# Altium PCB PCB1.PcbDoc (part 8 of 12)
Units mm, origin at the board's own origin, x right, y up, seen from the top; angles counter-clockwise.
Board outline 122.17 x 121.67 mm, 2 copper layers (Top Layer, Bottom Layer); 274 components, 225 nets, 941 pads, 421 vias.
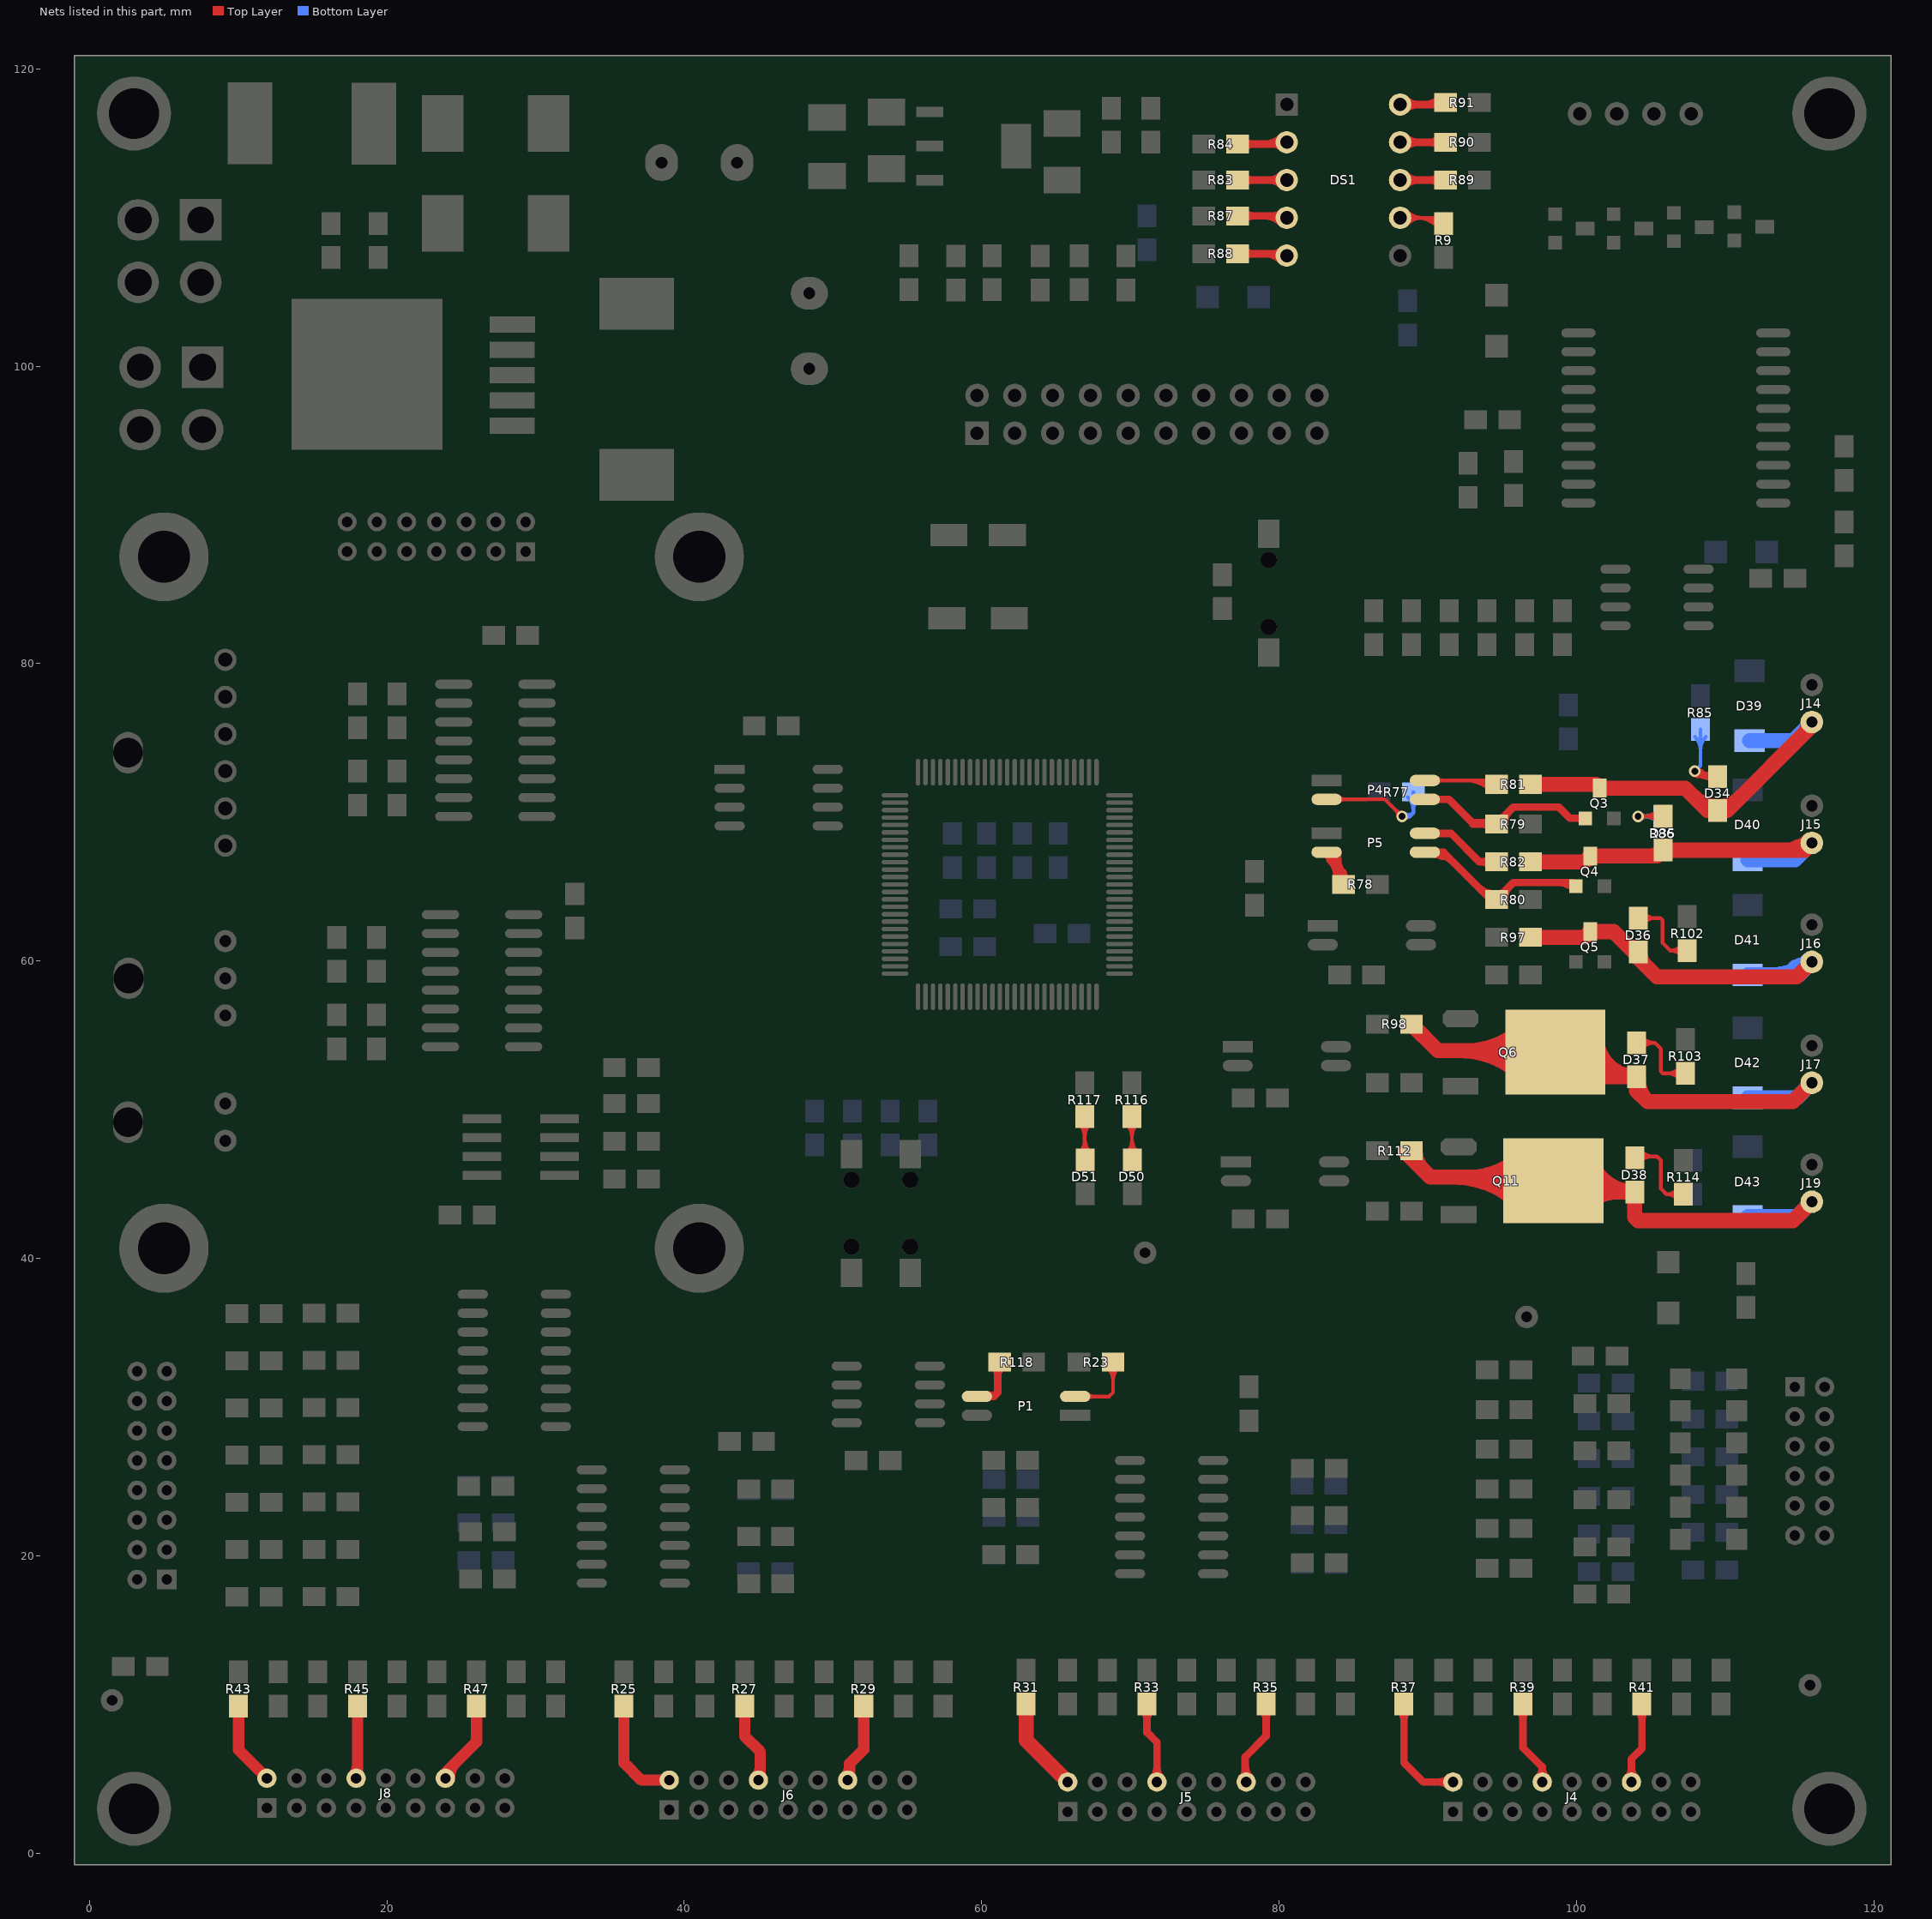
[diagram p8: the nets of this part, all layers, seen from the top]

## Via types
v1: diameter 0.762, hole 0.457, Top Layer to Bottom Layer, 339 vias
v2: diameter 1.27, hole 0.457, Top Layer to Bottom Layer, 39 vias
v3: diameter 0.889, hole 0.457, Top Layer to Bottom Layer, 21 vias
v4: diameter 1.27, hole 0.711, Top Layer to Bottom Layer, 12 vias
v5: diameter 1.524, hole 0.711, Top Layer to Bottom Layer, 5 vias
v6: diameter 1.016, hole 0.457, Top Layer to Bottom Layer, 3 vias
v7: diameter 0.711, hole 0.457, Top Layer to Bottom Layer, 1 vias
v8: diameter 1.524, hole 0.457, Top Layer to Bottom Layer, 1 vias

## Nets (pads, with @x,y where several pads share a name; then routed paths per layer and width w, separated by ;. In a path a pad name is that pad's centre, name@x,y a point inside that pad or via, vN(x,y) a via of type N, cw(c..) or ccw(c..) an arc to the next point about the centre after c; other vN are vias at no path point) (continued)
NetD34_1: D34.1 R85.2 | length 51.5
  Top Layer w0.254: D34.1@109.497,72.414 108.307,72.414 ; v1@107.77,72.591 ccw(c108.2,73.021) 108.2,72.414 ; v1@107.77,72.591 ccw(c108.2,73.021) 108.2,72.414 ; v1@107.77,72.591 ccw(c108.2,73.021) 108.2,72.414 ; v1(107.95,72.771) ccw(c108.697,73.202) 108.474,72.369 ; v1(107.95,72.771) ccw(c108.437,72.9) 108.306,72.414 ; v1(107.95,72.771) cw(c108.05,72.488) 108.31,72.638 ; v1(107.95,72.771) cw(c108.195,72.338) 108.444,72.769 ; v1(107.95,72.771) cw(c108.05,72.488) 108.31,72.638 ; v1(107.95,72.771) ccw(c108.697,73.202) 108.474,72.369 ; v1(107.95,72.771) ccw(c108.437,72.9) 108.306,72.414 ; v1(107.95,72.771) ccw(c108.813,73.634) 108.813,72.414 ; v1(107.95,72.771) cw(c108.05,72.488) 108.31,72.638 ; v1(107.95,72.771) cw(c108.195,72.338) 108.444,72.769 ; v1(107.95,72.771) ccw(c108.697,73.202) 108.474,72.369 ; v1(107.95,72.771) ccw(c108.437,72.9) 108.306,72.414 ; v1(107.95,72.771) ccw(c108.697,73.202) 108.474,72.369 ; v1(107.95,72.771) ccw(c108.437,72.9) 108.306,72.414 ; v1(107.95,72.771) ccw(c108.813,73.634) 108.813,72.414 ; v1(107.95,72.771) cw(c108.05,72.488) 108.31,72.638 ; v1(107.95,72.771) cw(c108.195,72.338) 108.444,72.769 ; v1(107.95,72.771) ccw(c108.697,73.202) 108.474,72.369 ; v1(107.95,72.771) ccw(c108.437,72.9) 108.306,72.414 ; v1(107.95,72.771) ccw(c108.697,73.202) 108.474,72.369 ; v1(107.95,72.771) ccw(c108.437,72.9) 108.306,72.414 ; v1(107.95,72.771) ccw(c108.813,73.634) 108.813,72.414 ; v1(107.95,72.771) 108.307,72.414 ; v1@107.987,72.52 cw(c108.042,72.148) 108.307,72.414 ; v1@107.987,72.52 cw(c108.042,72.148) 108.307,72.414 ; v1@107.987,72.52 cw(c108.042,72.148) 108.307,72.414 ; v1@108.013,72.525 cw(c108.078,72.267) 108.266,72.455 ; v1@108.013,72.525 cw(c108.078,72.267) 108.266,72.455 ; v1@108.013,72.525 cw(c108.078,72.267) 108.266,72.455 ; v1@108.013,72.525 cw(c108.078,72.267) 108.266,72.455 ; v1@108.016,72.526 cw(c108.174,71.933) 108.481,72.464 ; v1@108.016,72.526 cw(c108.174,71.933) 108.481,72.464 ; v1@108.016,72.526 cw(c108.174,71.933) 108.481,72.464 ; v1@108.075,72.55 cw(c108.449,71.89) 108.829,72.547 ; v1@108.075,72.55 cw(c108.449,71.89) 108.829,72.547 ; v1@108.075,72.55 cw(c108.449,71.89) 108.829,72.547 ; v1@108.13,72.951 ccw(c109.426,74.247) D34.1@109.426,72.414 ; v1@108.13,72.951 ccw(c109.426,74.247) D34.1@109.426,72.414 ; v1@108.13,72.951 ccw(c109.426,74.247) D34.1@109.426,72.414 ; v1@108.195,72.836 ccw(c108.926,73.03) 108.73,72.3 ; v1@108.195,72.836 ccw(c108.926,73.03) 108.73,72.3 ; v1@108.195,72.836 ccw(c108.926,73.03) 108.73,72.3 ; v1@108.195,72.836 ccw(c108.926,73.03) 108.73,72.3 ; v1@108.195,72.836 ccw(c108.926,73.03) 108.73,72.3 ; v1@108.195,72.836 ccw(c108.926,73.03) 108.73,72.3 ; v1@108.195,72.837 ccw(c108.788,72.995) 108.481,72.464 ; v1@108.195,72.837 ccw(c108.788,72.995) 108.481,72.464 ; v1@108.195,72.837 ccw(c108.788,72.995) 108.481,72.464 ; v1@108.196,72.708 ccw(c108.454,72.643) 108.266,72.455 ; v1@108.196,72.708 ccw(c108.454,72.643) 108.266,72.455 ; v1@108.196,72.708 ccw(c108.454,72.643) 108.266,72.455 ; v1@108.196,72.708 ccw(c108.454,72.643) 108.266,72.455 ; v1@108.201,72.734 ccw(c108.573,72.679) 108.307,72.414 ; v1@108.201,72.734 ccw(c108.573,72.679) 108.307,72.414 ; v1@108.201,72.734 ccw(c108.573,72.679) 108.307,72.414 ; 108.307,72.414 cw(c108.307,71.274) D34.1@109.13,72.062 ; 108.307,72.414 ccw(c108.307,73.553) D34.1@109.13,72.765 ; 108.307,72.414 cw(c108.307,71.274) D34.1@109.13,72.062 ; 108.307,72.414 ccw(c108.307,73.553) D34.1@109.13,72.765 ; 108.307,72.414 cw(c108.307,71.274) D34.1@109.13,72.062 ; 108.307,72.414 ccw(c108.307,73.553) D34.1@109.13,72.765 ; 108.745,72.596 cw(c108.636,72.188) D34.1@109.027,72.348 ; 108.745,72.596 ccw(c108.807,72.827) D34.1@109.028,72.735 ; 108.745,72.596 cw(c108.636,72.188) D34.1@109.027,72.348 ; 108.745,72.596 ccw(c108.807,72.827) D34.1@109.028,72.735 ; 108.745,72.596 cw(c108.636,72.188) D34.1@109.027,72.348 ; 108.745,72.596 ccw(c108.807,72.827) D34.1@109.028,72.735
  Bottom Layer w0.254: v1(107.95,72.771) 108.331,73.152 R85.2@108.331,75.565 ; R85.2@107.972,75.079 cw(c107.105,74.212) 108.331,74.212 ; R85.2@107.972,75.079 cw(c107.105,74.212) 108.331,74.212 ; R85.2@107.972,75.079 cw(c107.105,74.212) 108.331,74.212 ; 108.331,74.212 cw(c109.557,74.212) R85.2@108.69,75.079 ; 108.331,74.212 cw(c109.557,74.212) R85.2@108.69,75.079 ; 108.331,74.212 cw(c109.557,74.212) R85.2@108.69,75.079
NetD34_2: D34.2 D39.A J14.2 Q3.3 R81.2 | length 44.7
  Top Layer w1.016: R81.2@96.901,71.882 101.311,71.882 Q3.3@101.561,71.632 107.311,71.632 108.815,70.128 D34.2@109.497,70.128 110.133,70.128 115.824,75.819 J14.2@115.824,76.073 ; 107.9,71.043 ccw(c109.497,72.641) D34.2@109.497,70.382 ; 107.9,71.043 ccw(c109.497,72.641) D34.2@109.497,70.382 ; 107.9,71.043 ccw(c109.497,72.641) D34.2@109.497,70.382 ; 107.9,71.043 ccw(c109.497,72.641) D34.2@109.497,70.382 ; D34.2@109.497,70.382 ccw(c109.497,72.529) 111.015,71.01 ; D34.2@109.497,70.382 ccw(c109.497,72.529) 111.015,71.01 ; D34.2@109.497,70.382 ccw(c109.497,72.529) 111.015,71.01 ; D34.2@109.497,70.382 ccw(c109.497,72.529) 111.015,71.01 ; 115.211,75.206 ccw(c114.344,76.073) J14.2@115.57,76.073 ; 115.211,75.206 ccw(c114.344,76.073) J14.2@115.57,76.073 ; 115.211,75.206 ccw(c114.344,76.073) J14.2@115.57,76.073 ; 115.211,75.206 ccw(c114.344,76.073) J14.2@115.57,76.073
  Bottom Layer w1.016: D39.A@111.637,74.815 114.566,74.815 J14.2@115.824,76.073
NetD35_1: D35.1 R86.2 | length 26.5
  Top Layer w0.254: v1(104.14,69.723) 104.164,69.747 D35.1@105.814,69.747 ; v1@104.32,69.543 cw(c104.81,69.053) 104.81,69.747 ; v1@104.32,69.543 cw(c104.81,69.053) 104.81,69.747 ; v1@104.32,69.543 cw(c104.81,69.053) 104.81,69.747 ; v1@104.32,69.543 cw(c104.81,69.053) 104.81,69.747 ; v1@104.32,69.903 ccw(c104.696,70.279) 104.696,69.747 ; v1@104.32,69.903 ccw(c104.696,70.279) 104.696,69.747 ; v1@104.32,69.903 ccw(c104.696,70.279) 104.696,69.747 ; v1@104.32,69.903 ccw(c104.696,70.279) 104.696,69.747 ; 104.588,69.747 cw(c104.588,68.52) D35.1@105.455,69.387 ; 104.588,69.747 ccw(c104.588,70.973) D35.1@105.455,70.106 ; 104.588,69.747 cw(c104.588,68.52) D35.1@105.455,69.387 ; 104.588,69.747 ccw(c104.588,70.973) D35.1@105.455,70.106 ; 104.588,69.747 cw(c104.588,68.52) D35.1@105.455,69.387 ; 104.588,69.747 ccw(c104.588,70.973) D35.1@105.455,70.106 ; 104.588,69.747 cw(c104.588,68.52) D35.1@105.455,69.387 ; 104.588,69.747 ccw(c104.588,70.973) D35.1@105.455,70.106
  Bottom Layer w0.254: v1(104.14,69.723) R86.2@105.791,69.723 ; v1@104.32,69.543 cw(c104.753,69.11) 104.753,69.723 ; v1@104.32,69.543 cw(c104.753,69.11) 104.753,69.723 ; v1@104.32,69.543 cw(c104.753,69.11) 104.753,69.723 ; v1@104.32,69.543 cw(c104.753,69.11) 104.753,69.723 ; v1@104.32,69.903 ccw(c104.753,70.336) 104.753,69.723 ; v1@104.32,69.903 ccw(c104.753,70.336) 104.753,69.723 ; v1@104.32,69.903 ccw(c104.753,70.336) 104.753,69.723 ; v1@104.32,69.903 ccw(c104.753,70.336) 104.753,69.723 ; 104.565,69.723 cw(c104.565,68.497) R86.2@105.432,69.364 ; 104.565,69.723 ccw(c104.565,70.949) R86.2@105.432,70.082 ; 104.565,69.723 cw(c104.565,68.497) R86.2@105.432,69.364 ; 104.565,69.723 ccw(c104.565,70.949) R86.2@105.432,70.082 ; 104.565,69.723 cw(c104.565,68.497) R86.2@105.432,69.364 ; 104.565,69.723 ccw(c104.565,70.949) R86.2@105.432,70.082 ; 104.565,69.723 cw(c104.565,68.497) R86.2@105.432,69.364 ; 104.565,69.723 ccw(c104.565,70.949) R86.2@105.432,70.082
NetD35_2: D35.2 D40.A J15.2 Q4.3 R82.2 | length 41.4
  Top Layer w1.016: R82.2@96.901,66.675 100.542,66.675 Q4.3@100.926,67.06 105.413,67.06 D35.2@105.814,67.461 115.34,67.461 J15.2@115.824,67.945 ; 104.846,67.06 ccw(c104.846,68.302) D35.2@105.724,67.423 ; 104.846,67.06 ccw(c104.846,68.302) D35.2@105.724,67.423 ; 104.846,67.06 ccw(c104.846,68.302) D35.2@105.724,67.423 ; 104.846,67.06 ccw(c104.846,68.302) D35.2@105.724,67.423 ; 114.041,67.461 ccw(c114.041,69.728) J15.2@115.644,68.125 ; 114.041,67.461 ccw(c114.041,69.728) J15.2@115.644,68.125 ; 114.041,67.461 ccw(c114.041,69.728) J15.2@115.644,68.125 ; 114.041,67.461 ccw(c114.041,69.728) J15.2@115.644,68.125 ; 114.751,67.609 cw(c115.352,66.568) J15.2@115.742,67.705 ; 114.751,67.609 cw(c115.352,66.568) J15.2@115.742,67.705 ; 114.751,67.609 cw(c115.352,66.568) J15.2@115.742,67.705 ; 114.751,67.609 cw(c115.352,66.568) J15.2@115.742,67.705 ; 114.751,67.609 cw(c115.352,66.568) J15.2@115.742,67.705 ; 114.751,67.609 cw(c115.352,66.568) J15.2@115.742,67.705
  Bottom Layer w1.016: D40.A@111.51,66.814 114.693,66.814 J15.2@115.824,67.945
NetD36_1: D36.1 R102.2 | length 18.4
  Top Layer w0.254: D36.1@104.163,62.889 105.259,62.889 ; R102.2@107.442,60.706 106.299,60.706 ; D36.1@104.551,62.56 cw(c105.259,61.96) 105.259,62.889 ; D36.1@104.551,62.56 cw(c105.259,61.96) 105.259,62.889 ; D36.1@104.551,62.56 cw(c105.259,61.96) 105.259,62.889 ; D36.1@104.551,62.56 cw(c105.259,61.96) 105.259,62.889 ; D36.1@104.551,63.217 ccw(c105.259,63.817) 105.259,62.889 ; D36.1@104.551,63.217 ccw(c105.259,63.817) 105.259,62.889 ; D36.1@104.551,63.217 ccw(c105.259,63.817) 105.259,62.889 ; D36.1@104.551,63.217 ccw(c105.259,63.817) 105.259,62.889 ; 105.259,62.889 105.64,62.889 105.791,62.738 105.791,62.357 105.791,61.214 106.299,60.706 ; 106.299,60.706 cw(c106.299,59.674) R102.2@107.065,60.366 ; 106.299,60.706 ccw(c106.299,61.738) R102.2@107.065,61.046 ; 106.299,60.706 cw(c106.299,59.674) R102.2@107.065,60.366 ; 106.299,60.706 ccw(c106.299,61.738) R102.2@107.065,61.046 ; 106.299,60.706 cw(c106.299,59.674) R102.2@107.065,60.366 ; 106.299,60.706 ccw(c106.299,61.738) R102.2@107.065,61.046 ; 106.299,60.706 cw(c106.299,59.674) R102.2@107.065,60.366 ; 106.299,60.706 ccw(c106.299,61.738) R102.2@107.065,61.046
NetD36_2: D36.2 D41.A J16.2 Q5.3 R97.2 | length 54.2
  Top Layer w1.016: R97.2@96.901,61.595 100.542,61.595 Q5.3@100.926,61.98 102.485,61.98 103.862,60.603 D36.2@104.163,60.603 104.163,60.175 105.41,58.928 114.808,58.928 J16.2@115.824,59.944 ; 103.216,61.249 ccw(c104.163,62.196) D36.2@104.163,60.857 ; 103.216,61.249 ccw(c104.163,62.196) D36.2@104.163,60.857 ; 103.216,61.249 ccw(c104.163,62.196) D36.2@104.163,60.857 ; 103.216,61.249 ccw(c104.163,62.196) D36.2@104.163,60.857 ; D36.2@104.29,60.476 ccw(c105.323,60.476) 104.593,59.745 ; D36.2@104.29,60.476 ccw(c105.323,60.476) 104.593,59.745 ; D36.2@104.29,60.476 ccw(c105.323,60.476) 104.593,59.745 ; D36.2@104.29,60.476 ccw(c105.323,60.476) 104.593,59.745
  Bottom Layer w1.016: D41.A@111.51,59.067 114.947,59.067 J16.2@115.824,59.944 ; 113.094,59.067 ccw(c113.094,62.674) J16.2@115.644,60.124 ; 113.094,59.067 ccw(c113.094,62.674) J16.2@115.644,60.124 ; 113.094,59.067 ccw(c113.094,62.674) J16.2@115.644,60.124 ; 113.094,59.067 ccw(c113.094,62.674) J16.2@115.644,60.124 ; 114.657,59.554 cw(c115.383,58.297) J16.2@115.758,59.699 ; 114.657,59.554 cw(c115.383,58.297) J16.2@115.758,59.699 ; 114.657,59.554 cw(c115.383,58.297) J16.2@115.758,59.699 ; 114.657,59.554 cw(c115.383,58.297) J16.2@115.758,59.699 ; 114.657,59.554 cw(c115.383,58.297) J16.2@115.758,59.699 ; 114.657,59.554 cw(c115.383,58.297) J16.2@115.758,59.699 ; 115.007,59.699 ccw(c115.007,60.362) J16.2@115.598,60.06 ; 115.007,59.699 ccw(c115.007,60.362) J16.2@115.598,60.06 ; 115.007,59.699 ccw(c115.007,60.362) J16.2@115.598,60.06 ; 115.007,59.699 ccw(c115.007,60.362) J16.2@115.598,60.06
NetD37_1: D37.1 R103.2 | length 20.4
  Top Layer w0.254: D37.1@104.036,54.507 105.259,54.507 ; R103.2@107.315,52.451 105.791,52.451 105.664,52.578 105.664,54.102 105.259,54.507 ; D37.1@104.396,54.148 cw(c105.259,53.288) 105.259,54.507 ; D37.1@104.396,54.148 cw(c105.259,53.288) 105.259,54.507 ; D37.1@104.396,54.148 cw(c105.259,53.288) 105.259,54.507 ; D37.1@104.396,54.148 cw(c105.259,53.288) 105.259,54.507 ; D37.1@104.396,54.865 ccw(c105.259,55.725) 105.259,54.507 ; D37.1@104.396,54.865 ccw(c105.259,55.725) 105.259,54.507 ; D37.1@104.396,54.865 ccw(c105.259,55.725) 105.259,54.507 ; D37.1@104.396,54.865 ccw(c105.259,55.725) 105.259,54.507 ; 106.089,52.451 cw(c106.089,51.225) R103.2@106.956,52.092 ; 106.089,52.451 ccw(c106.089,53.677) R103.2@106.956,52.81 ; 106.089,52.451 cw(c106.089,51.225) R103.2@106.956,52.092 ; 106.089,52.451 ccw(c106.089,53.677) R103.2@106.956,52.81 ; 106.089,52.451 cw(c106.089,51.225) R103.2@106.956,52.092 ; 106.089,52.451 ccw(c106.089,53.677) R103.2@106.956,52.81 ; 106.089,52.451 cw(c106.089,51.225) R103.2@106.956,52.092 ; 106.089,52.451 ccw(c106.089,53.677) R103.2@106.956,52.81
NetD37_2: D37.2 D42.A J17.2 Q6.2 R98.2 | length 137.4
  Top Layer w1.016: R98.2@88.9,55.753 90.678,53.975 98.806,53.975 98.933,53.848 100.56,52.221 D37.2@104.036,52.221 ; 92.162,53.975 cw(c92.162,47.956) Q6.2@96.418,52.212 ; 92.652,53.975 ccw(c92.652,59.3) Q6.2@96.418,55.535 ; 94.614,53.975 cw(c94.614,50.409) Q6.2@97.136,52.93 ; 95.105,53.975 ccw(c95.105,56.847) Q6.2@97.136,54.816 ; Q6.2@99.406,53.939 ccw(c101.527,54.39) Q6.2@101.527,52.221 ; Q6.2@100.399,54.15 ccw(c102.782,54.656) 102.782,52.221 ; Q6.2@101.393,54.361 ccw(c104.036,54.922) D37.2@104.036,52.221 ; J17.2@115.824,51.816 114.554,50.546 104.775,50.546 ; 92.152,53.975 cw(c92.152,47.956) Q6.2@96.408,52.212 ; 92.152,53.975 cw(c92.152,47.956) Q6.2@96.408,52.212 ; 92.152,53.975 cw(c92.152,47.956) Q6.2@96.408,52.212 ; 92.642,53.975 ccw(c92.642,59.3) Q6.2@96.408,55.535 ; 92.642,53.975 ccw(c92.642,59.3) Q6.2@96.408,55.535 ; 92.642,53.975 ccw(c92.642,59.3) Q6.2@96.408,55.535 ; 94.605,53.975 cw(c94.605,50.409) Q6.2@97.126,52.93 ; 94.605,53.975 cw(c94.605,50.409) Q6.2@97.126,52.93 ; 94.605,53.975 cw(c94.605,50.409) Q6.2@97.126,52.93 ; 95.095,53.975 ccw(c95.095,56.847) Q6.2@97.126,54.816 ; 95.095,53.975 ccw(c95.095,56.847) Q6.2@97.126,54.816 ; 95.095,53.975 ccw(c95.095,56.847) Q6.2@97.126,54.816 ; Q6.2@99.396,53.94 ccw(c101.523,54.396) Q6.2@101.523,52.221 ; Q6.2@99.396,53.94 ccw(c101.523,54.396) Q6.2@101.523,52.221 ; Q6.2@99.396,53.94 ccw(c101.523,54.396) Q6.2@101.523,52.221 ; Q6.2@100.389,54.153 ccw(c102.779,54.665) 102.779,52.221 ; Q6.2@100.389,54.153 ccw(c102.779,54.665) 102.779,52.221 ; Q6.2@100.389,54.153 ccw(c102.779,54.665) 102.779,52.221 ; Q6.2@101.383,54.366 ccw(c104.036,54.934) D37.2@104.036,52.221 ; Q6.2@101.383,54.366 ccw(c104.036,54.934) D37.2@104.036,52.221 ; Q6.2@101.383,54.366 ccw(c104.036,54.934) D37.2@104.036,52.221 ; D37.2@104.036,52.221 104.036,51.285 104.775,50.546 ; D37.2@104.163,52.09 ccw(c106.254,52.025) 104.775,50.546 ; D37.2@104.163,52.09 ccw(c106.254,52.025) 104.775,50.546 ; D37.2@104.163,52.09 ccw(c106.254,52.025) 104.775,50.546 ; D37.2@104.163,52.09 ccw(c106.254,52.025) 104.775,50.546
  Bottom Layer w1.016: D42.A@111.51,50.812 114.82,50.812 J17.2@115.824,51.816
NetD38_1: D38.1 R114.2 | length 22.3
  Top Layer w0.254: D38.1@103.909,46.76 104.013,46.863 105.41,46.863 105.664,46.609 105.664,44.704 106.045,44.323 ; R114.2@107.188,44.323 106.045,44.323 ; D38.1@104.089,47.066 ccw(c104.579,47.557) 104.579,46.863 ; D38.1@104.089,47.066 ccw(c104.579,47.557) 104.579,46.863 ; D38.1@104.089,47.066 ccw(c104.579,47.557) 104.579,46.863 ; D38.1@104.089,47.066 ccw(c104.579,47.557) 104.579,46.863 ; D38.1@104.268,46.527 cw(c105.079,45.717) 105.079,46.863 ; D38.1@104.268,46.527 cw(c105.079,45.717) 105.079,46.863 ; D38.1@104.268,46.527 cw(c105.079,45.717) 105.079,46.863 ; D38.1@104.268,46.527 cw(c105.079,45.717) 105.079,46.863 ; D38.1@104.268,47.246 ccw(c105.193,48.17) 105.193,46.863 ; D38.1@104.268,47.246 ccw(c105.193,48.17) 105.193,46.863 ; D38.1@104.268,47.246 ccw(c105.193,48.17) 105.193,46.863 ; D38.1@104.268,47.246 ccw(c105.193,48.17) 105.193,46.863 ; 106.045,44.323 cw(c106.045,43.291) R114.2@106.811,43.983 ; 106.045,44.323 ccw(c106.045,45.355) R114.2@106.811,44.663 ; 106.045,44.323 cw(c106.045,43.291) R114.2@106.811,43.983 ; 106.045,44.323 ccw(c106.045,45.355) R114.2@106.811,44.663 ; 106.045,44.323 cw(c106.045,43.291) R114.2@106.811,43.983 ; 106.045,44.323 ccw(c106.045,45.355) R114.2@106.811,44.663 ; 106.045,44.323 cw(c106.045,43.291) R114.2@106.811,43.983 ; 106.045,44.323 ccw(c106.045,45.355) R114.2@106.811,44.663
NetD38_2: D38.2 D43.A J19.2 Q11.2 R112.2 | length 123.8
  Top Layer w1.016: R112.2@88.519,47.117 90.17,45.466 98.679,45.466 98.933,45.212 99.671,44.474 D38.2@103.909,44.474 ; 91.728,45.466 cw(c91.728,39.013) Q11.2@96.291,43.576 ; 92.832,45.466 ccw(c92.832,50.358) Q11.2@96.291,46.899 ; 94.181,45.466 cw(c94.181,41.466) Q11.2@97.009,44.294 ; Q11.2@100.171,45.813 ccw(c102.297,46.83) 102.297,44.474 ; Q11.2@100.629,43.576 cw(c102.796,41.409) 102.796,44.474 ; Q11.2@101.087,46.252 ccw(c103.909,47.602) D38.2@103.909,44.474 ; J19.2@115.824,43.815 114.554,42.545 104.14,42.545 103.909,42.776 D38.2@103.909,44.474 ; R112.2@89.154,47.244 ccw(c90.994,47.244) 89.693,45.943 ; R112.2@89.154,47.244 ccw(c90.994,47.244) 89.693,45.943 ; R112.2@89.154,47.244 ccw(c90.994,47.244) 89.693,45.943 ; R112.2@89.154,47.244 ccw(c90.994,47.244) 89.693,45.943 ; 91.718,45.466 cw(c91.718,39.013) Q11.2@96.281,43.576 ; 91.718,45.466 cw(c91.718,39.013) Q11.2@96.281,43.576 ; 91.718,45.466 cw(c91.718,39.013) Q11.2@96.281,43.576 ; 92.822,45.466 ccw(c92.822,50.358) Q11.2@96.281,46.899 ; 92.822,45.466 ccw(c92.822,50.358) Q11.2@96.281,46.899 ; 92.822,45.466 ccw(c92.822,50.358) Q11.2@96.281,46.899 ; 94.171,45.466 cw(c94.171,41.466) Q11.2@96.999,44.294 ; 94.171,45.466 cw(c94.171,41.466) Q11.2@96.999,44.294 ; 94.171,45.466 cw(c94.171,41.466) Q11.2@96.999,44.294 ; Q11.2@100.16,45.815 ccw(c102.293,46.84) 102.293,44.474 ; Q11.2@100.16,45.815 ccw(c102.293,46.84) 102.293,44.474 ; Q11.2@100.16,45.815 ccw(c102.293,46.84) 102.293,44.474 ; Q11.2@100.62,43.576 cw(c102.787,41.409) 102.787,44.474 ; Q11.2@100.62,43.576 cw(c102.787,41.409) 102.787,44.474 ; Q11.2@100.62,43.576 cw(c102.787,41.409) 102.787,44.474 ; Q11.2@101.076,46.255 ccw(c103.909,47.617) D38.2@103.909,44.474 ; Q11.2@101.076,46.255 ccw(c103.909,47.617) D38.2@103.909,44.474 ; Q11.2@101.076,46.255 ccw(c103.909,47.617) D38.2@103.909,44.474
  Bottom Layer w1.016: D43.A@111.51,42.811 114.82,42.811 J19.2@115.824,43.815
NetD50_1: D50.1 R116.2 | length 16.1
  Top Layer w0.254: R116.2@70.104,49.53 70.104,46.656 D50.1@70.127,46.633 ; R116.2@69.745,49.044 cw(c68.878,48.177) 70.104,48.177 ; R116.2@69.745,49.044 cw(c68.878,48.177) 70.104,48.177 ; R116.2@69.745,49.044 cw(c68.878,48.177) 70.104,48.177 ; D50.1@69.768,47.119 ccw(c68.957,47.93) 70.104,47.93 ; D50.1@69.768,47.119 ccw(c68.957,47.93) 70.104,47.93 ; D50.1@69.768,47.119 ccw(c68.957,47.93) 70.104,47.93 ; 70.104,47.429 ccw(c70.796,47.429) D50.1@70.307,46.939 ; 70.104,47.429 ccw(c70.796,47.429) D50.1@70.307,46.939 ; 70.104,47.429 ccw(c70.796,47.429) D50.1@70.307,46.939 ; 70.104,48.042 ccw(c71.41,48.042) D50.1@70.486,47.119 ; 70.104,48.042 ccw(c71.41,48.042) D50.1@70.486,47.119 ; 70.104,48.042 ccw(c71.41,48.042) D50.1@70.486,47.119 ; 70.104,48.177 cw(c71.33,48.177) R116.2@70.463,49.044 ; 70.104,48.177 cw(c71.33,48.177) R116.2@70.463,49.044 ; 70.104,48.177 cw(c71.33,48.177) R116.2@70.463,49.044
NetD51_1: D51.1 R117.2 | length 16.1
  Top Layer w0.254: R117.2@66.929,49.53 66.929,46.656 D51.1@66.952,46.633 ; R117.2@66.57,49.044 cw(c65.703,48.177) 66.929,48.177 ; R117.2@66.57,49.044 cw(c65.703,48.177) 66.929,48.177 ; R117.2@66.57,49.044 cw(c65.703,48.177) 66.929,48.177 ; D51.1@66.593,47.119 ccw(c65.782,47.93) 66.929,47.93 ; D51.1@66.593,47.119 ccw(c65.782,47.93) 66.929,47.93 ; D51.1@66.593,47.119 ccw(c65.782,47.93) 66.929,47.93 ; 66.929,47.429 ccw(c67.621,47.429) D51.1@67.132,46.939 ; 66.929,47.429 ccw(c67.621,47.429) D51.1@67.132,46.939 ; 66.929,47.429 ccw(c67.621,47.429) D51.1@67.132,46.939 ; 66.929,48.042 ccw(c68.235,48.042) D51.1@67.311,47.119 ; 66.929,48.042 ccw(c68.235,48.042) D51.1@67.311,47.119 ; 66.929,48.042 ccw(c68.235,48.042) D51.1@67.311,47.119 ; 66.929,48.177 cw(c68.155,48.177) R117.2@67.288,49.044 ; 66.929,48.177 cw(c68.155,48.177) R117.2@67.288,49.044 ; 66.929,48.177 cw(c68.155,48.177) R117.2@67.288,49.044
NetDS1_2: DS1.2 R84.2 | length 16.7
  Top Layer w0.508: R84.2@77.216,114.935 80.391,114.935 DS1.2@80.518,115.062 ; R84.2@77.612,114.666 cw(c78.263,114.015) 78.263,114.935 ; R84.2@77.612,114.666 cw(c78.263,114.015) 78.263,114.935 ; R84.2@77.612,114.666 cw(c78.263,114.015) 78.263,114.935 ; R84.2@77.612,114.666 cw(c78.263,114.015) 78.263,114.935 ; R84.2@77.612,115.204 ccw(c78.263,115.855) 78.263,114.935 ; R84.2@77.612,115.204 ccw(c78.263,115.855) 78.263,114.935 ; R84.2@77.612,115.204 ccw(c78.263,115.855) 78.263,114.935 ; R84.2@77.612,115.204 ccw(c78.263,115.855) 78.263,114.935 ; 79.014,114.935 ccw(c79.014,116.566) DS1.2@80.167,115.413 ; 79.014,114.935 ccw(c79.014,116.566) DS1.2@80.167,115.413 ; 79.014,114.935 ccw(c79.014,116.566) DS1.2@80.167,115.413 ; 79.014,114.935 ccw(c79.014,116.566) DS1.2@80.167,115.413 ; 79.627,114.935 cw(c79.627,114.171) DS1.2@80.167,114.711 ; 79.627,114.935 cw(c79.627,114.171) DS1.2@80.167,114.711 ; 79.627,114.935 cw(c79.627,114.171) DS1.2@80.167,114.711 ; 79.627,114.935 cw(c79.627,114.171) DS1.2@80.167,114.711
NetDS1_3: DS1.3 R83.2 | length 16.6
  Top Layer w0.508: R83.2@77.216,112.522 DS1.3@80.518,112.522 ; R83.2@77.612,112.253 cw(c78.263,111.602) 78.263,112.522 ; R83.2@77.612,112.253 cw(c78.263,111.602) 78.263,112.522 ; R83.2@77.612,112.253 cw(c78.263,111.602) 78.263,112.522 ; R83.2@77.612,112.253 cw(c78.263,111.602) 78.263,112.522 ; R83.2@77.612,112.791 ccw(c78.263,113.442) 78.263,112.522 ; R83.2@77.612,112.791 ccw(c78.263,113.442) 78.263,112.522 ; R83.2@77.612,112.791 ccw(c78.263,113.442) 78.263,112.522 ; R83.2@77.612,112.791 ccw(c78.263,113.442) 78.263,112.522 ; 79.321,112.522 cw(c79.321,111.325) DS1.3@80.167,112.171 ; 79.321,112.522 ccw(c79.321,113.719) DS1.3@80.167,112.873 ; 79.321,112.522 cw(c79.321,111.325) DS1.3@80.167,112.171 ; 79.321,112.522 ccw(c79.321,113.719) DS1.3@80.167,112.873 ; 79.321,112.522 cw(c79.321,111.325) DS1.3@80.167,112.171 ; 79.321,112.522 ccw(c79.321,113.719) DS1.3@80.167,112.873 ; 79.321,112.522 cw(c79.321,111.325) DS1.3@80.167,112.171 ; 79.321,112.522 ccw(c79.321,113.719) DS1.3@80.167,112.873
NetDS1_4: DS1.4 R87.2 | length 16.7
  Top Layer w0.508: R87.2@77.216,110.109 80.391,110.109 DS1.4@80.518,109.982 ; R87.2@77.612,109.84 cw(c78.263,109.189) 78.263,110.109 ; R87.2@77.612,109.84 cw(c78.263,109.189) 78.263,110.109 ; R87.2@77.612,109.84 cw(c78.263,109.189) 78.263,110.109 ; R87.2@77.612,109.84 cw(c78.263,109.189) 78.263,110.109 ; R87.2@77.612,110.378 ccw(c78.263,111.029) 78.263,110.109 ; R87.2@77.612,110.378 ccw(c78.263,111.029) 78.263,110.109 ; R87.2@77.612,110.378 ccw(c78.263,111.029) 78.263,110.109 ; R87.2@77.612,110.378 ccw(c78.263,111.029) 78.263,110.109 ; 79.014,110.109 cw(c79.014,108.478) DS1.4@80.167,109.631 ; 79.014,110.109 cw(c79.014,108.478) DS1.4@80.167,109.631 ; 79.014,110.109 cw(c79.014,108.478) DS1.4@80.167,109.631 ; 79.014,110.109 cw(c79.014,108.478) DS1.4@80.167,109.631 ; 79.627,110.109 ccw(c79.627,110.873) DS1.4@80.167,110.333 ; 79.627,110.109 ccw(c79.627,110.873) DS1.4@80.167,110.333 ; 79.627,110.109 ccw(c79.627,110.873) DS1.4@80.167,110.333 ; 79.627,110.109 ccw(c79.627,110.873) DS1.4@80.167,110.333
NetDS1_5: DS1.5 R88.2 | length 16.7
  Top Layer w0.508: R88.2@77.216,107.569 80.391,107.569 DS1.5@80.518,107.442 ; R88.2@77.612,107.3 cw(c78.263,106.649) 78.263,107.569 ; R88.2@77.612,107.3 cw(c78.263,106.649) 78.263,107.569 ; R88.2@77.612,107.3 cw(c78.263,106.649) 78.263,107.569 ; R88.2@77.612,107.3 cw(c78.263,106.649) 78.263,107.569 ; R88.2@77.612,107.838 ccw(c78.263,108.489) 78.263,107.569 ; R88.2@77.612,107.838 ccw(c78.263,108.489) 78.263,107.569 ; R88.2@77.612,107.838 ccw(c78.263,108.489) 78.263,107.569 ; R88.2@77.612,107.838 ccw(c78.263,108.489) 78.263,107.569 ; 79.014,107.569 cw(c79.014,105.938) DS1.5@80.167,107.091 ; 79.014,107.569 cw(c79.014,105.938) DS1.5@80.167,107.091 ; 79.014,107.569 cw(c79.014,105.938) DS1.5@80.167,107.091 ; 79.014,107.569 cw(c79.014,105.938) DS1.5@80.167,107.091 ; 79.627,107.569 ccw(c79.627,108.333) DS1.5@80.167,107.793 ; 79.627,107.569 ccw(c79.627,108.333) DS1.5@80.167,107.793 ; 79.627,107.569 ccw(c79.627,108.333) DS1.5@80.167,107.793 ; 79.627,107.569 ccw(c79.627,108.333) DS1.5@80.167,107.793
NetDS1_7: DS1.7 R9.2 | length 35
  Top Layer w0.254: DS1.7@88.138,109.982 90.678,109.982 R9.2@91.059,109.601 ; DS1.7@88.399,109.721 cw(c89.029,109.091) 89.029,109.982 ; DS1.7@88.399,109.721 cw(c89.029,109.091) 89.029,109.982 ; DS1.7@88.399,109.721 cw(c89.029,109.091) 89.029,109.982 ; DS1.7@88.399,109.721 cw(c89.029,109.091) 89.029,109.982 ; DS1.7@88.399,110.243 ccw(c89.029,110.873) 89.029,109.982 ; DS1.7@88.399,110.243 ccw(c89.029,110.873) 89.029,109.982 ; DS1.7@88.399,110.243 ccw(c89.029,110.873) 89.029,109.982 ; DS1.7@88.399,110.243 ccw(c89.029,110.873) 89.029,109.982 ; DS1.7@88.579,109.541 cw(c89.642,108.478) 89.642,109.982 ; DS1.7@88.579,109.541 cw(c89.642,108.478) 89.642,109.982 ; DS1.7@88.579,109.541 cw(c89.642,108.478) 89.642,109.982 ; DS1.7@88.579,109.541 cw(c89.642,108.478) 89.642,109.982 ; DS1.7@88.579,110.423 ccw(c89.642,111.486) 89.642,109.982 ; DS1.7@88.579,110.423 ccw(c89.642,111.486) 89.642,109.982 ; DS1.7@88.579,110.423 ccw(c89.642,111.486) 89.642,109.982 ; DS1.7@88.579,110.423 ccw(c89.642,111.486) 89.642,109.982 ; 89.219,109.982 cw(c89.219,107.888) R9.2@90.7,109.369 ; 89.219,109.982 cw(c89.219,107.888) R9.2@90.7,109.369 ; 89.219,109.982 cw(c89.219,107.888) R9.2@90.7,109.369 ; 89.219,109.982 cw(c89.219,107.888) R9.2@90.7,109.369 ; 89.833,109.982 cw(c89.833,108.502) R9.2@90.879,109.548 ; 89.833,109.982 cw(c89.833,108.502) R9.2@90.879,109.548 ; 89.833,109.982 cw(c89.833,108.502) R9.2@90.879,109.548 ; 89.833,109.982 cw(c89.833,108.502) R9.2@90.879,109.548 ; 90.387,109.833 cw(c90.193,109.496) R9.2@90.568,109.597 ; 90.387,109.833 cw(c90.193,109.496) R9.2@90.568,109.597 ; 90.387,109.833 cw(c90.193,109.496) R9.2@90.568,109.597 ; 90.387,109.833 cw(c90.193,109.496) R9.2@90.568,109.597 ; 90.387,109.833 cw(c90.193,109.496) R9.2@90.568,109.597 ; 90.387,109.833 cw(c90.193,109.496) R9.2@90.568,109.597 ; R9.2@90.446,109.982 cw(c90.446,109.115) R9.2@91.059,109.728 ; R9.2@90.446,109.982 ccw(c90.446,110.341) R9.2@90.7,110.087 ; R9.2@90.446,109.982 cw(c90.446,109.115) R9.2@91.059,109.728 ; R9.2@90.446,109.982 ccw(c90.446,110.341) R9.2@90.7,110.087 ; R9.2@90.446,109.982 cw(c90.446,109.115) R9.2@91.059,109.728 ; R9.2@90.446,109.982 ccw(c90.446,110.341) R9.2@90.7,110.087 ; R9.2@90.446,109.982 cw(c90.446,109.115) R9.2@91.059,109.728 ; R9.2@90.446,109.982 ccw(c90.446,110.341) R9.2@90.7,110.087
NetDS1_8: DS1.8 R89.2 | length 16.4
  Top Layer w0.508: DS1.8@88.138,112.522 R89.2@91.186,112.522 ; DS1.8@88.489,112.171 cw(c89.335,111.325) 89.335,112.522 ; DS1.8@88.489,112.171 cw(c89.335,111.325) 89.335,112.522 ; DS1.8@88.489,112.171 cw(c89.335,111.325) 89.335,112.522 ; DS1.8@88.489,112.171 cw(c89.335,111.325) 89.335,112.522 ; DS1.8@88.489,112.873 ccw(c89.335,113.719) 89.335,112.522 ; DS1.8@88.489,112.873 ccw(c89.335,113.719) 89.335,112.522 ; DS1.8@88.489,112.873 ccw(c89.335,113.719) 89.335,112.522 ; DS1.8@88.489,112.873 ccw(c89.335,113.719) 89.335,112.522 ; 90.139,112.522 cw(c90.139,111.602) R89.2@90.79,112.253 ; 90.139,112.522 ccw(c90.139,113.442) R89.2@90.79,112.791 ; 90.139,112.522 cw(c90.139,111.602) R89.2@90.79,112.253 ; 90.139,112.522 ccw(c90.139,113.442) R89.2@90.79,112.791 ; 90.139,112.522 cw(c90.139,111.602) R89.2@90.79,112.253 ; 90.139,112.522 ccw(c90.139,113.442) R89.2@90.79,112.791 ; 90.139,112.522 cw(c90.139,111.602) R89.2@90.79,112.253 ; 90.139,112.522 ccw(c90.139,113.442) R89.2@90.79,112.791
NetDS1_9: DS1.9 R90.2 | length 16.4
  Top Layer w0.508: DS1.9@88.138,115.062 R90.2@91.186,115.062 ; DS1.9@88.489,114.711 cw(c89.335,113.865) 89.335,115.062 ; DS1.9@88.489,114.711 cw(c89.335,113.865) 89.335,115.062 ; DS1.9@88.489,114.711 cw(c89.335,113.865) 89.335,115.062 ; DS1.9@88.489,114.711 cw(c89.335,113.865) 89.335,115.062 ; DS1.9@88.489,115.413 ccw(c89.335,116.259) 89.335,115.062 ; DS1.9@88.489,115.413 ccw(c89.335,116.259) 89.335,115.062 ; DS1.9@88.489,115.413 ccw(c89.335,116.259) 89.335,115.062 ; DS1.9@88.489,115.413 ccw(c89.335,116.259) 89.335,115.062 ; 90.139,115.062 cw(c90.139,114.142) R90.2@90.79,114.793 ; 90.139,115.062 ccw(c90.139,115.982) R90.2@90.79,115.331 ; 90.139,115.062 cw(c90.139,114.142) R90.2@90.79,114.793 ; 90.139,115.062 ccw(c90.139,115.982) R90.2@90.79,115.331 ; 90.139,115.062 cw(c90.139,114.142) R90.2@90.79,114.793 ; 90.139,115.062 ccw(c90.139,115.982) R90.2@90.79,115.331 ; 90.139,115.062 cw(c90.139,114.142) R90.2@90.79,114.793 ; 90.139,115.062 ccw(c90.139,115.982) R90.2@90.79,115.331
NetDS1_10: DS1.10 R91.2 | length 14.9
  Top Layer w0.508: DS1.10@88.138,117.602 91.059,117.602 R91.2@91.186,117.729 ; DS1.10@88.489,117.251 cw(c89.335,116.405) 89.335,117.602 ; DS1.10@88.489,117.251 cw(c89.335,116.405) 89.335,117.602 ; DS1.10@88.489,117.251 cw(c89.335,116.405) 89.335,117.602 ; DS1.10@88.489,117.251 cw(c89.335,116.405) 89.335,117.602 ; DS1.10@88.489,117.953 ccw(c89.335,118.799) 89.335,117.602 ; DS1.10@88.489,117.953 ccw(c89.335,118.799) 89.335,117.602 ; DS1.10@88.489,117.953 ccw(c89.335,118.799) 89.335,117.602 ; DS1.10@88.489,117.953 ccw(c89.335,118.799) 89.335,117.602 ; 89.833,117.602 ccw(c89.833,118.955) R91.2@90.79,117.998 ; 89.833,117.602 ccw(c89.833,118.955) R91.2@90.79,117.998 ; 89.833,117.602 ccw(c89.833,118.955) R91.2@90.79,117.998 ; 89.833,117.602 ccw(c89.833,118.955) R91.2@90.79,117.998
NetJ4_2: J4.2 R37.2 | length 16.8
  Top Layer w0.508: R37.2@88.265,9.906 R37.2@88.392,10.033 88.392,6.096 89.694,4.794 J4.2@91.694,4.794 ; R37.2@88.123,9.637 cw(c87.472,8.986) 88.392,8.986 ; R37.2@88.123,9.637 cw(c87.472,8.986) 88.392,8.986 ; R37.2@88.123,9.637 cw(c87.472,8.986) 88.392,8.986 ; 88.392,8.986 cw(c89.312,8.986) R37.2@88.661,9.637 ; 88.392,8.986 cw(c89.312,8.986) R37.2@88.661,9.637 ; 88.392,8.986 cw(c89.312,8.986) R37.2@88.661,9.637 ; 90.738,4.794 cw(c90.738,3.838) J4.2@91.414,4.514 ; 90.738,4.794 ccw(c90.738,5.75) J4.2@91.414,5.074 ; 90.738,4.794 cw(c90.738,3.838) J4.2@91.414,4.514 ; 90.738,4.794 ccw(c90.738,5.75) J4.2@91.414,5.074 ; 90.738,4.794 cw(c90.738,3.838) J4.2@91.414,4.514 ; 90.738,4.794 ccw(c90.738,5.75) J4.2@91.414,5.074
NetJ4_8: J4.8 R39.2 | length 16.1
  Top Layer w0.508: R39.2@96.393,10.033 96.393,7.112 97.694,5.811 J4.8@97.694,4.794 ; R39.2@96.124,9.637 cw(c95.473,8.986) 96.393,8.986 ; R39.2@96.124,9.637 cw(c95.473,8.986) 96.393,8.986 ; R39.2@96.124,9.637 cw(c95.473,8.986) 96.393,8.986 ; R39.2@96.124,9.637 cw(c95.473,8.986) 96.393,8.986 ; 96.393,8.986 cw(c97.313,8.986) R39.2@96.662,9.637 ; 96.393,8.986 cw(c97.313,8.986) R39.2@96.662,9.637 ; 96.393,8.986 cw(c97.313,8.986) R39.2@96.662,9.637 ; 96.393,8.986 cw(c97.313,8.986) R39.2@96.662,9.637 ; J4.8@97.414,5.074 ccw(c96.738,5.75) 97.694,5.75 ; J4.8@97.414,5.074 ccw(c96.738,5.75) 97.694,5.75 ; J4.8@97.414,5.074 ccw(c96.738,5.75) 97.694,5.75 ; 97.694,5.75 ccw(c98.65,5.75) J4.8@97.974,5.074 ; 97.694,5.75 ccw(c98.65,5.75) J4.8@97.974,5.074 ; 97.694,5.75 ccw(c98.65,5.75) J4.8@97.974,5.074
NetJ4_14: J4.14 R41.2 | length 15.8
  Top Layer w0.508: J4.14@103.694,4.794 103.694,6.35 104.394,7.05 R41.2@104.394,10.033 ; J4.14@103.414,5.074 ccw(c102.738,5.75) 103.694,5.75 ; J4.14@103.414,5.074 ccw(c102.738,5.75) 103.694,5.75 ; J4.14@103.414,5.074 ccw(c102.738,5.75) 103.694,5.75 ; 103.694,5.75 ccw(c104.65,5.75) J4.14@103.974,5.074 ; 103.694,5.75 ccw(c104.65,5.75) J4.14@103.974,5.074 ; 103.694,5.75 ccw(c104.65,5.75) J4.14@103.974,5.074 ; R41.2@104.125,9.637 cw(c103.474,8.986) 104.394,8.986 ; R41.2@104.125,9.637 cw(c103.474,8.986) 104.394,8.986 ; R41.2@104.125,9.637 cw(c103.474,8.986) 104.394,8.986 ; R41.2@104.125,9.637 cw(c103.474,8.986) 104.394,8.986 ; 104.394,8.986 cw(c105.314,8.986) R41.2@104.663,9.637 ; 104.394,8.986 cw(c105.314,8.986) R41.2@104.663,9.637 ; 104.394,8.986 cw(c105.314,8.986) R41.2@104.663,9.637 ; 104.394,8.986 cw(c105.314,8.986) R41.2@104.663,9.637
NetJ5_2: J5.2 R31.2 | length 6.4
  Top Layer w1.016: R31.2@62.992,10.033 62.992,7.588 J5.2@65.786,4.794
NetJ5_8: J5.8 R33.2 | length 15.9
  Top Layer w0.508: R33.2@71.12,10.033 71.12,8.128 71.786,7.462 J5.8@71.786,4.794 J5.8@71.659,4.794 ; R33.2@70.851,9.637 cw(c70.2,8.986) 71.12,8.986 ; R33.2@70.851,9.637 cw(c70.2,8.986) 71.12,8.986 ; R33.2@70.851,9.637 cw(c70.2,8.986) 71.12,8.986 ; R33.2@70.851,9.637 cw(c70.2,8.986) 71.12,8.986 ; 71.12,8.986 cw(c72.04,8.986) R33.2@71.389,9.637 ; 71.12,8.986 cw(c72.04,8.986) R33.2@71.389,9.637 ; 71.12,8.986 cw(c72.04,8.986) R33.2@71.389,9.637 ; 71.12,8.986 cw(c72.04,8.986) R33.2@71.389,9.637 ; J5.8@71.506,5.074 ccw(c70.83,5.75) 71.786,5.75 ; J5.8@71.506,5.074 ccw(c70.83,5.75) 71.786,5.75 ; J5.8@71.506,5.074 ccw(c70.83,5.75) 71.786,5.75 ; 71.786,5.75 ccw(c72.742,5.75) J5.8@72.066,5.074 ; 71.786,5.75 ccw(c72.742,5.75) J5.8@72.066,5.074 ; 71.786,5.75 ccw(c72.742,5.75) J5.8@72.066,5.074
NetJ5_14: J5.14 R35.2 | length 16.1
  Top Layer w0.508: J5.14@77.786,4.794 77.724,4.856 77.724,6.477 79.121,7.874 R35.2@79.121,10.033 ; J5.14@77.506,5.074 ccw(c76.98,5.6) 77.724,5.6 ; J5.14@77.506,5.074 ccw(c76.98,5.6) 77.724,5.6 ; J5.14@77.506,5.074 ccw(c76.98,5.6) 77.724,5.6 ; 77.724,5.9 ccw(c78.892,5.9) J5.14@78.066,5.074 ; 77.724,5.9 ccw(c78.892,5.9) J5.14@78.066,5.074 ; 77.724,5.9 ccw(c78.892,5.9) J5.14@78.066,5.074 ; R35.2@78.852,9.637 cw(c78.201,8.986) 79.121,8.986 ; R35.2@78.852,9.637 cw(c78.201,8.986) 79.121,8.986 ; R35.2@78.852,9.637 cw(c78.201,8.986) 79.121,8.986 ; R35.2@78.852,9.637 cw(c78.201,8.986) 79.121,8.986 ; 79.121,8.986 cw(c80.041,8.986) R35.2@79.39,9.637 ; 79.121,8.986 cw(c80.041,8.986) R35.2@79.39,9.637 ; 79.121,8.986 cw(c80.041,8.986) R35.2@79.39,9.637 ; 79.121,8.986 cw(c80.041,8.986) R35.2@79.39,9.637
NetJ6_2: J6.2 R25.2 | length 7.3
  Top Layer w0.762: R25.2@35.941,9.906 35.941,6.096 37.116,4.921 J6.2@38.989,4.921
NetJ6_8: J6.8 R27.2 | length 8
  Top Layer w0.762: R27.2@44.069,9.906 44.069,7.874 45.116,6.827 45.116,5.048 J6.8@44.989,4.921 ; J6.8@44.799,5.111 ccw(c44.033,5.877) 45.116,5.877 ; J6.8@44.799,5.111 ccw(c44.033,5.877) 45.116,5.877 ; J6.8@44.799,5.111 ccw(c44.033,5.877) 45.116,5.877
NetJ6_14: J6.14 R29.2 | length 8
  Top Layer w0.762: J6.14@50.989,4.921 51.116,5.048 51.116,6.031 52.07,6.985 R29.2@52.07,9.906 ; J6.14@50.799,5.111 ccw(c50.033,5.877) 51.116,5.877 ; J6.14@50.799,5.111 ccw(c50.033,5.877) 51.116,5.877 ; J6.14@50.799,5.111 ccw(c50.033,5.877) 51.116,5.877
NetJ8_2: J8.2 R43.2 | length 5.6
  Top Layer w0.762: R43.2@10.033,9.906 10.033,6.953 J8.2@11.938,5.048
NetJ8_8: J8.8 R45.2 | length 7.3
  Top Layer w0.762: J8.8@18.034,5.048 R45.2@18.034,10.033 ; J8.8@17.748,5.238 ccw(c17.057,5.929) 18.034,5.929 ; J8.8@17.748,5.238 ccw(c17.057,5.929) 18.034,5.929 ; J8.8@17.748,5.238 ccw(c17.057,5.929) 18.034,5.929
NetJ8_14: J8.14 R47.2 | length 8.9
  Top Layer w0.762: J8.14@23.938,5.396 26.035,7.493 R47.2@26.035,9.906 ; J8.14@24.207,5.048 cw(c25.697,5.048) 24.643,6.101 ; J8.14@24.207,5.048 cw(c25.697,5.048) 24.643,6.101 ; J8.14@24.207,5.048 cw(c25.697,5.048) 24.643,6.101
NetP1_2: P1.2 R23.1 | length 13.5
  Top Layer w0.254: P1.2@66.286,30.723 68.569,30.723 68.834,30.988 R23.1@68.834,33.02 R23.1@68.707,33.147 ; P1.2@67.101,30.544 cw(c67.534,30.11) 67.534,30.723 ; P1.2@67.101,30.544 cw(c67.534,30.11) 67.534,30.723 ; P1.2@67.101,30.544 cw(c67.534,30.11) 67.534,30.723 ; P1.2@67.101,30.903 ccw(c67.534,31.336) 67.534,30.723 ; P1.2@67.101,30.903 ccw(c67.534,31.336) 67.534,30.723 ; P1.2@67.101,30.903 ccw(c67.534,31.336) 67.534,30.723 ; R23.1@68.475,32.661 cw(c67.608,31.794) 68.834,31.794 ; R23.1@68.475,32.661 cw(c67.608,31.794) 68.834,31.794 ; R23.1@68.475,32.661 cw(c67.608,31.794) 68.834,31.794 ; 68.834,31.794 cw(c70.06,31.794) R23.1@69.193,32.661 ; 68.834,31.794 cw(c70.06,31.794) R23.1@69.193,32.661 ; 68.834,31.794 cw(c70.06,31.794) R23.1@69.193,32.661
NetP1_3: P1.3 R118.2 | length 10.4
  Top Layer w0.508: P1.3@59.682,30.723 60.822,30.723 61.087,30.988 ; R118.2@61.087,33.147 61.087,30.988 ; P1.3@60.365,30.841 ccw(c60.615,31.46) 61.087,30.988 ; P1.3@60.365,30.841 ccw(c60.615,31.46) 61.087,30.988 ; P1.3@60.365,30.841 ccw(c60.615,31.46) 61.087,30.988 ; R118.2@60.818,32.751 cw(c60.167,32.1) 61.087,32.1 ; R118.2@60.818,32.751 cw(c60.167,32.1) 61.087,32.1 ; R118.2@60.818,32.751 cw(c60.167,32.1) 61.087,32.1 ; 61.087,32.1 cw(c62.007,32.1) R118.2@61.356,32.751 ; 61.087,32.1 cw(c62.007,32.1) R118.2@61.356,32.751 ; 61.087,32.1 cw(c62.007,32.1) R118.2@61.356,32.751
NetP4_2: P4.2 R77.1 | length 28.3
  Top Layer w0.254: P4.2@83.193,70.877 87.111,70.877 v1(88.265,69.723) ; P4.2@84.008,70.697 cw(c84.441,70.264) 84.441,70.877 ; P4.2@84.008,70.697 cw(c84.441,70.264) 84.441,70.877 ; P4.2@84.008,70.697 cw(c84.441,70.264) 84.441,70.877 ; P4.2@84.008,71.056 ccw(c84.441,71.49) 84.441,70.877 ; P4.2@84.008,71.056 ccw(c84.441,71.49) 84.441,70.877 ; P4.2@84.008,71.056 ccw(c84.441,71.49) 84.441,70.877 ; 87.831,70.157 cw(c87.398,69.723) v1@88.011,69.723 ; 87.831,70.157 ccw(c88.265,70.59) v1@88.265,69.977 ; 87.831,70.157 cw(c87.398,69.723) v1@88.011,69.723 ; 87.831,70.157 ccw(c88.265,70.59) v1@88.265,69.977 ; 87.831,70.157 cw(c87.398,69.723) v1@88.011,69.723 ; 87.831,70.157 ccw(c88.265,70.59) v1@88.265,69.977 ; 87.925,70.043 ccw(c88.354,70.158) v1(88.265,69.723) ; 87.925,70.043 ccw(c88.354,70.158) v1(88.265,69.723) ; 87.925,70.043 ccw(c88.354,70.158) v1(88.265,69.723) ; 87.945,70.063 cw(c87.83,69.634) v1(88.265,69.723) ; 87.945,70.063 cw(c87.83,69.634) v1(88.265,69.723) ; 87.945,70.063 cw(c87.83,69.634) v1(88.265,69.723)
  Bottom Layer w0.254: R77.1@89.027,71.374 89.027,69.977 ; v1(88.265,69.723) ccw(c88.515,70.068) 88.817,69.767 ; v1(88.265,69.723) ccw(c88.515,70.068) 88.817,69.767 ; v1(88.265,69.723) ccw(c88.515,70.068) 88.817,69.767 ; v1(88.265,69.723) 88.773,69.723 ; v1@88.414,69.929 ccw(c88.692,70.312) 89.027,69.977 ; v1@88.414,69.929 ccw(c88.692,70.312) 89.027,69.977 ; v1@88.414,69.929 ccw(c88.692,70.312) 89.027,69.977 ; v1@88.468,69.571 cw(c88.773,69.342) 88.773,69.723 ; v1@88.468,69.571 cw(c88.773,69.342) 88.773,69.723 ; v1@88.468,69.571 cw(c88.773,69.342) 88.773,69.723 ; v1@88.468,69.875 ccw(c88.773,70.104) 88.773,69.723 ; v1@88.468,69.875 ccw(c88.773,70.104) 88.773,69.723 ; v1@88.468,69.875 ccw(c88.773,70.104) 88.773,69.723 ; R77.1@88.668,71.015 cw(c87.801,70.148) 89.027,70.148 ; R77.1@88.668,71.015 cw(c87.801,70.148) 89.027,70.148 ; R77.1@88.668,71.015 cw(c87.801,70.148) 89.027,70.148 ; 88.773,69.723 89.027,69.977 ; 89.027,70.148 cw(c90.253,70.148) R77.1@89.386,71.015 ; 89.027,70.148 cw(c90.253,70.148) R77.1@89.386,71.015 ; 89.027,70.148 cw(c90.253,70.148) R77.1@89.386,71.015
NetP4_3: P4.3 Q3.1 R79.1 | length 32.2
  Top Layer w0.508: P4.3@89.797,70.877 91.429,70.877 93.011,69.295 R79.1@93.944,69.295 ; 93.011,69.215 R79.1@94.615,69.215 95.758,70.358 98.806,70.358 99.564,69.6 Q3.1@100.596,69.6 ; 93.374,69.295 cw(c93.374,68.101) R79.1@94.219,68.946 ; 93.374,69.295 cw(c93.374,68.101) R79.1@94.219,68.946 ; 93.374,69.295 cw(c93.374,68.101) R79.1@94.219,68.946 ; 93.568,69.215 cw(c93.568,68.295) R79.1@94.219,68.946 ; 93.568,69.215 ccw(c93.568,70.135) R79.1@94.219,69.484 ; 93.568,69.215 cw(c93.568,68.295) R79.1@94.219,68.946 ; 93.568,69.215 ccw(c93.568,70.135) R79.1@94.219,69.484 ; 93.568,69.215 cw(c93.568,68.295) R79.1@94.219,68.946 ; 93.568,69.215 ccw(c93.568,70.135) R79.1@94.219,69.484 ; 93.568,69.215 cw(c93.568,68.295) R79.1@94.219,68.946 ; 93.568,69.215 ccw(c93.568,70.135) R79.1@94.219,69.484 ; 93.762,69.295 ccw(c93.762,69.941) R79.1@94.219,69.484 ; 93.762,69.295 ccw(c93.762,69.941) R79.1@94.219,69.484 ; 93.762,69.295 ccw(c93.762,69.941) R79.1@94.219,69.484 ; R79.1@94.742,69.596 ccw(c94.742,70.209) R79.1@95.176,69.776 ; R79.1@94.742,69.596 ccw(c94.742,70.209) R79.1@95.176,69.776 ; R79.1@94.742,69.596 ccw(c94.742,70.209) R79.1@95.176,69.776 ; R79.1@94.742,69.596 ccw(c94.742,70.209) R79.1@95.176,69.776 ; R79.1@95.123,69.215 cw(c96.349,69.215) 95.482,70.082 ; R79.1@95.123,69.215 cw(c96.349,69.215) 95.482,70.082 ; R79.1@95.123,69.215 cw(c96.349,69.215) 95.482,70.082 ; R79.1@95.123,69.215 cw(c96.349,69.215) 95.482,70.082 ; 100.106,69.6 cw(c100.106,69.109) Q3.1@100.453,69.456 ; 100.106,69.6 ccw(c100.106,70.09) Q3.1@100.453,69.743 ; 100.106,69.6 cw(c100.106,69.109) Q3.1@100.453,69.456 ; 100.106,69.6 ccw(c100.106,70.09) Q3.1@100.453,69.743 ; 100.106,69.6 cw(c100.106,69.109) Q3.1@100.453,69.456 ; 100.106,69.6 ccw(c100.106,70.09) Q3.1@100.453,69.743 ; 100.106,69.6 cw(c100.106,69.109) Q3.1@100.453,69.456 ; 100.106,69.6 ccw(c100.106,70.09) Q3.1@100.453,69.743
NetP4_4: P4.4 R81.1 | length 20.9
  Top Layer w0.254: P4.4@89.797,72.147 94.35,72.147 R81.1@94.615,71.882 ; P4.4@90.612,71.967 cw(c91.045,71.534) 91.045,72.147 ; P4.4@90.612,71.967 cw(c91.045,71.534) 91.045,72.147 ; P4.4@90.612,71.967 cw(c91.045,71.534) 91.045,72.147 ; P4.4@90.612,72.326 ccw(c91.045,72.76) 91.045,72.147 ; P4.4@90.612,72.326 ccw(c91.045,72.76) 91.045,72.147 ; P4.4@90.612,72.326 ccw(c91.045,72.76) 91.045,72.147 ; 92.622,72.147 cw(c92.622,70.016) R81.1@94.129,71.523 ; 92.622,72.147 cw(c92.622,70.016) R81.1@94.129,71.523 ; 92.622,72.147 cw(c92.622,70.016) R81.1@94.129,71.523 ; 93.235,72.147 cw(c93.235,70.629) R81.1@94.308,71.702 ; 93.235,72.147 cw(c93.235,70.629) R81.1@94.308,71.702 ; 93.235,72.147 cw(c93.235,70.629) R81.1@94.308,71.702 ; 93.816,71.987 cw(c93.622,71.65) R81.1@93.997,71.751 ; 93.816,71.987 cw(c93.622,71.65) R81.1@93.997,71.751 ; 93.816,71.987 cw(c93.622,71.65) R81.1@93.997,71.751 ; 93.849,72.147 cw(c93.849,71.243) R81.1@94.488,71.882 ; 93.849,72.147 cw(c93.849,71.243) R81.1@94.488,71.882 ; 93.849,72.147 cw(c93.849,71.243) R81.1@94.488,71.882 ; R81.1@93.901,72.147 ccw(c93.901,72.469) R81.1@94.129,72.241 ; R81.1@93.901,72.147 ccw(c93.901,72.469) R81.1@94.129,72.241 ; R81.1@93.901,72.147 ccw(c93.901,72.469) R81.1@94.129,72.241
  Top Layer w0.508: 93.838,72.024 ccw(c94.488,72.675) R81.1@94.488,71.755
NetP5_2: P5.2 R78.1 | length 38.1
  Top Layer w0.508: P5.2@83.439,67.31 83.439,66.802 ; R78.1@84.328,65.151 84.328,65.913 ; P5.2@83.141,67.205 cw(c82.938,66.747) 83.439,66.747 ; P5.2@83.141,67.205 cw(c82.938,66.747) 83.439,66.747 ; P5.2@83.141,67.205 cw(c82.938,66.747) 83.439,66.747 ; P5.2@83.141,67.205 cw(c82.938,66.747) 83.439,66.747 ; 83.439,66.802 cw(c82.332,65.695) R78.1@83.835,65.257 ; 83.439,66.802 cw(c82.332,65.695) R78.1@83.835,65.257 ; 83.439,66.802 cw(c82.332,65.695) R78.1@83.835,65.257 ; 83.439,66.802 cw(c82.332,65.695) R78.1@83.835,65.257 ; 83.439,66.802 84.328,65.913 ; P5.2@83.459,67.415 ccw(c84.343,67.189) 83.698,66.543 ; P5.2@83.459,67.415 ccw(c84.343,67.189) 83.698,66.543 ; P5.2@83.459,67.415 ccw(c84.343,67.189) 83.698,66.543 ; P5.2@83.459,67.415 ccw(c84.343,67.189) 83.698,66.543 ; P5.2@83.739,67.23 cw(c83.232,66.711) 83.957,66.719 ; P5.2@83.739,67.23 cw(c83.232,66.711) 83.957,66.719 ; P5.2@83.739,67.23 cw(c83.232,66.711) 83.957,66.719 ; P5.2@83.739,67.23 cw(c83.232,66.711) 83.957,66.719 ; P5.2@83.739,67.23 cw(c83.232,66.711) 83.957,66.719 ; P5.2@83.739,67.23 cw(c83.232,66.711) 83.957,66.719 ; R78.1@83.846,65.741 ccw(c84.795,65.72) R78.1@84.109,65.063 ; R78.1@83.846,65.741 ccw(c84.795,65.72) R78.1@84.109,65.063 ; R78.1@83.846,65.741 ccw(c84.795,65.72) R78.1@84.109,65.063 ; R78.1@83.846,65.741 ccw(c84.795,65.72) R78.1@84.109,65.063 ; R78.1@83.846,65.741 ccw(c84.795,65.72) R78.1@84.109,65.063 ; R78.1@83.846,65.741 ccw(c84.795,65.72) R78.1@84.109,65.063 ; P5.2@83.951,67.289 ccw(c85.347,66.932) 84.328,65.913 ; P5.2@83.951,67.289 ccw(c85.347,66.932) 84.328,65.913 ; P5.2@83.951,67.289 ccw(c85.347,66.932) 84.328,65.913 ; P5.2@83.951,67.289 ccw(c85.347,66.932) 84.328,65.913 ; 84.046,66.195 cw(c83.272,65.421) R78.1@84.323,65.116 ; 84.046,66.195 cw(c83.272,65.421) R78.1@84.323,65.116 ; 84.046,66.195 cw(c83.272,65.421) R78.1@84.323,65.116 ; 84.046,66.195 cw(c83.272,65.421) R78.1@84.323,65.116 ; R78.1@84.099,65.456 ccw(c83.757,65.913) 84.328,65.913 ; R78.1@84.099,65.456 ccw(c83.757,65.913) 84.328,65.913 ; R78.1@84.099,65.456 ccw(c83.757,65.913) 84.328,65.913 ; R78.1@84.099,65.456 ccw(c83.757,65.913) 84.328,65.913 ; 84.328,65.913 ccw(c84.899,65.913) R78.1@84.557,65.456 ; 84.328,65.913 ccw(c84.899,65.913) R78.1@84.557,65.456 ; 84.328,65.913 ccw(c84.899,65.913) R78.1@84.557,65.456 ; 84.328,65.913 ccw(c84.899,65.913) R78.1@84.557,65.456
NetP5_3: P5.3 Q4.1 R80.1 | length 40.8
  Top Layer w0.508: P5.3@89.789,67.31 91.059,67.31 94.234,64.135 R80.1@94.615,64.135 95.758,65.278 99.711,65.278 Q4.1@99.961,65.028 ; P5.3@90.432,67.194 cw(c90.432,65.4) 91.701,66.668 ; P5.3@90.432,67.194 cw(c90.432,65.4) 91.701,66.668 ; P5.3@90.432,67.194 cw(c90.432,65.4) 91.701,66.668 ; P5.3@90.432,67.194 cw(c90.432,65.4) 91.701,66.668 ; P5.3@90.471,67.2 cw(c90.573,66.884) 90.808,67.119 ; P5.3@90.471,67.2 cw(c90.573,66.884) 90.808,67.119 ; P5.3@90.471,67.2 cw(c90.573,66.884) 90.808,67.119 ; P5.3@90.471,67.2 cw(c90.573,66.884) 90.808,67.119 ; P5.3@90.542,67.384 ccw(c91.17,67.747) 90.982,67.046 ; P5.3@90.542,67.384 ccw(c91.17,67.747) 90.982,67.046 ; P5.3@90.542,67.384 ccw(c91.17,67.747) 90.982,67.046 ; P5.3@90.542,67.384 ccw(c91.17,67.747) 90.982,67.046 ; P5.3@90.542,67.384 ccw(c91.17,67.747) 90.982,67.046 ; P5.3@90.542,67.384 ccw(c91.17,67.747) 90.982,67.046 ; 93.404,64.965 ccw(c94.488,66.049) R80.1@94.488,64.516 ; 93.404,64.965 ccw(c94.488,66.049) R80.1@94.488,64.516 ; 93.404,64.965 ccw(c94.488,66.049) R80.1@94.488,64.516 ; 93.404,64.965 ccw(c94.488,66.049) R80.1@94.488,64.516 ; R80.1@94.742,64.516 ccw(c94.742,65.129) R80.1@95.176,64.696 ; R80.1@94.742,64.516 ccw(c94.742,65.129) R80.1@95.176,64.696 ; R80.1@94.742,64.516 ccw(c94.742,65.129) R80.1@95.176,64.696 ; R80.1@94.742,64.516 ccw(c94.742,65.129) R80.1@95.176,64.696 ; R80.1@95.123,64.135 cw(c96.349,64.135) 95.482,65.002 ; R80.1@95.123,64.135 cw(c96.349,64.135) 95.482,65.002 ; R80.1@95.123,64.135 cw(c96.349,64.135) 95.482,65.002 ; R80.1@95.123,64.135 cw(c96.349,64.135) 95.482,65.002 ; 98.866,65.278 cw(c98.866,63.933) Q4.1@99.818,64.884 ; 98.866,65.278 cw(c98.866,63.933) Q4.1@99.818,64.884 ; 98.866,65.278 cw(c98.866,63.933) Q4.1@99.818,64.884 ; 98.866,65.278 cw(c98.866,63.933) Q4.1@99.818,64.884 ; 99.312,65.175 ccw(c99.564,65.611) Q4.1@99.847,65.195 ; 99.312,65.175 ccw(c99.564,65.611) Q4.1@99.847,65.195 ; 99.312,65.175 ccw(c99.564,65.611) Q4.1@99.847,65.195 ; 99.312,65.175 ccw(c99.564,65.611) Q4.1@99.847,65.195 ; 99.312,65.175 ccw(c99.564,65.611) Q4.1@99.847,65.195 ; 99.312,65.175 ccw(c99.564,65.611) Q4.1@99.847,65.195
NetP5_4: P5.4 R82.1 | length 11.4
  Top Layer w0.508: P5.4@89.789,68.58 91.567,68.58 93.472,66.675 R82.1@94.615,66.675 ; 93.568,66.675 cw(c93.568,65.755) R82.1@94.219,66.406 ; 93.568,66.675 ccw(c93.568,67.595) R82.1@94.219,66.944 ; 93.568,66.675 cw(c93.568,65.755) R82.1@94.219,66.406 ; 93.568,66.675 ccw(c93.568,67.595) R82.1@94.219,66.944 ; 93.568,66.675 cw(c93.568,65.755) R82.1@94.219,66.406 ; 93.568,66.675 ccw(c93.568,67.595) R82.1@94.219,66.944 ; 93.568,66.675 cw(c93.568,65.755) R82.1@94.219,66.406 ; 93.568,66.675 ccw(c93.568,67.595) R82.1@94.219,66.944